# Altium PCB Aptomat_Radio.PcbDoc
Units mm, origin at the board's own origin, x right, y up, seen from the top; angles counter-clockwise.
Board outline 89.01 x 23.51 mm, 2 copper layers (Top Layer, Bottom Layer), stack 1.58 mm thick; 45 components, 56 nets, 163 pads, 280 vias.
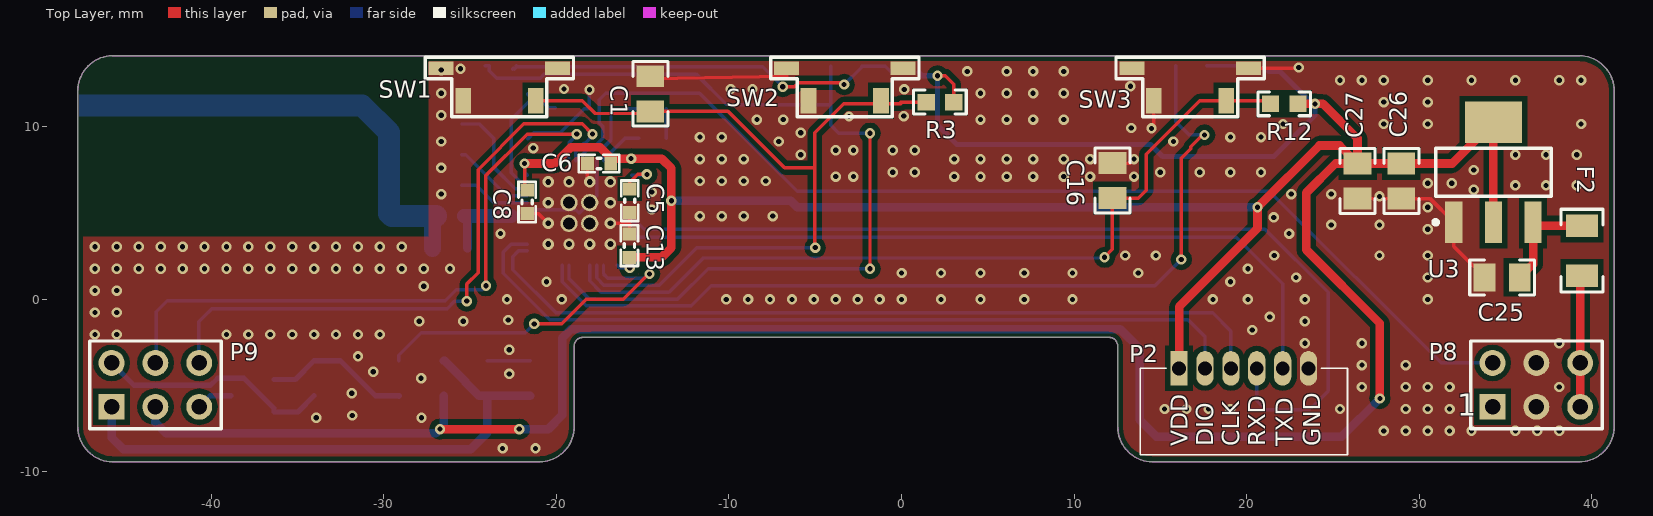
[diagram p0: Top Layer view]
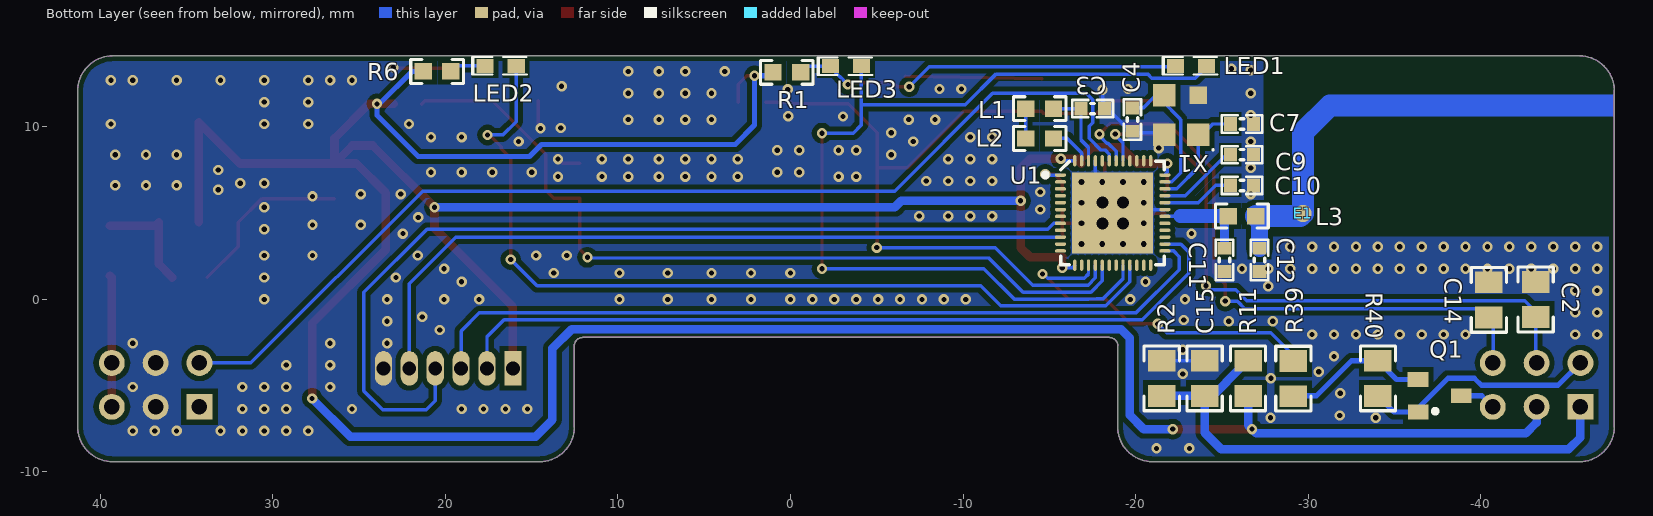
[diagram p1: Bottom Layer view, seen from below]

## Layer stack, top to bottom
Top Solder: solder mask 0.0102, Solder Resist, Dk 3.5
Top Layer: signal copper 0.0356
Dielectric 1: dielectric 1.5086, FR-4, Dk 4.8
Bottom Layer: signal copper 0.0356
Bottom Solder: solder mask 0.0102, Solder Resist, Dk 3.5

## Board outline
-45.72,-9.405 cw(c-45.72,-7.398) -47.727,-7.398 cw(c-45.72,-7.398) -47.727,-7.398 -47.727,12.102 cw(c-47.72,12.102) -47.727,12.102 ccw(c-45.72,12.102) -47.727,12.102 cw(c-45.72,12.102) -45.72,14.109 39.28,14.109 cw(c39.28,12.102) 41.287,12.102 41.287,-7.398 cw(c39.28,-7.398) 39.28,-9.405 cw(c39.28,-9.398) 39.28,-9.405 14.53,-9.405 ccw(c14.53,-9.398) 14.53,-9.405 cw(c14.53,-7.398) 12.523,-7.407 cw(c12.527,-7.401) 12.52,-7.401 12.52,-2.701 ccw(c12.027,-2.701) 12.027,-2.208 -18.473,-2.208 ccw(c-18.473,-2.701) -18.967,-2.701 -18.967,-3.192 cw(c-18.97,-3.198) -18.965,-3.193 cw(c-18.97,-3.198) -18.963,-3.198 -18.963,-7.398 ccw(c-18.97,-7.398) -18.963,-7.398 cw(c-20.97,-7.398) -20.97,-9.405 cw(c-20.97,-9.398) -20.97,-9.405

## Design rules (kind name [scope] priority, off if disabled: settings)
Clearance polygon [IsRegion] p1: gap=0.3
Clearance [All] p2: gap=0.2
MinimumSolderMaskSliver [All] p1: minsoldermaskwidth=0.1
PolygonConnect [All] p1: connectstyle=Direct reliefconductorwidth=0.254 reliefentries=4 polygonreliefangle="90 Angle" airgapwidth=0.254
RoutingVias [All] p1: holewidth=0.3 width=0.6 viastyle="Through Hole" minholewidth=0.3 minwidth=0.6 maxholewidth=5 maxwidth=5
SilkToSilkClearance [All] p1: silktosilkclearance=0.1
SilkToSolderMaskClearance [IsPad] p1: minsilkscreentomaskgap=0.01 clearancetoexposedcopper=TRUE
SolderMaskExpansion [All] p1: expansion=0.102
Width [All] p1: maxlimit=5 minlimit=0.127 preferedwidth=0.254
27 further rules are at their usual default settings.

## Components (designator, comment, footprint, x,y, rotation, side; value= is the part's Value field where it differs from the comment)
C1 "221" 0805_HV -14.554,11.913 r270 top
C2 "102" 0805_HV -43.18,0 r270 bottom
C3 "1.0µF" CAPC1608X06L -17.511,11.049 r0 bottom
C4 "12pF" CAPC1608X06L -19.812,10.414 r270 bottom
C5 "100nF" CAPC1608X06L -15.748,5.715 r270 top
C6 "4.7µF" CAPC1608X06L -17.526,7.874 r180 top
C7 "12pF" CAPC1608X06L -26.162,10.16 r180 bottom
C8 "100nF" CAPC1608X06L -21.692,5.65 r270 top
C9 "100pF" CAPC1608X06L -26.162,8.382 r180 bottom
C10 "N.C." CAPC1608X06L -26.162,6.604 r180 bottom
C11 "0.8pF" CAPC1608X06L -25.146,2.286 r90 bottom
C12 "1.2pF" CAPC1608X06L -27.178,2.286 r270 bottom
C13 "100nF" CAPC1608X06L -15.773,3.11 r90 top
C14 "102" 0805_HV -40.462,-0.025 r270 bottom
C15 "104" 0805_HV -24.003,-4.572 r270 bottom
C16 "221" 0805_HV 12.217,6.883 r270 top
C25 "105" 0805_HV 34.798,1.27 r0 top
C26 "105" 0805_HV 28.956,6.858 r90 top
C27 "105" 0805_HV 26.416,6.858 r90 top
E1 "Antenna" nrfant -29.693,4.978 r180 bottom
F2 "Res" 1206 39.421,2.822 r90 top
L1 "15nH" 0603 -14.44,11.049 r0 bottom
L2 "10µH" 0603 -14.44,9.322 r180 bottom
L3 "3.9nH" 0603 -26.162,4.826 r180 bottom
LED1 "L0603G" LED_0603N -23.213,13.528 r180 bottom
LED2 "L0603G" LED_0603N 16.792,13.528 r180 bottom
LED3 "L0603G" LED_0603N -3.216,13.514 r180 bottom
P2 "Header 6" CON6P-ZH1.5 16.08,-3.998 r0 top
P8 "Header 3X2" HDR2X3 34.239,-6.223 r0 top locked
P9 "Header 3X2" HDR2X3 -45.771,-6.223 r0 top
Q1 "C1815" SOT23B -37.612,-5.588 r90 bottom
R1 "220R" 0603 0.203,13.157 r0 bottom
R2 "2K" 0805_HV -21.514,-4.572 r90 bottom
R3 "100k" 0603 2.223,11.43 r0 top
R6 "220R" 0603 20.472,13.208 r0 bottom
R11 "2K" 0805_HV -26.518,-4.572 r90 bottom
R12 "100k" 0603 22.174,11.328 r0 top
R39 "1K" 0805_HV -29.134,-4.597 r90 bottom
R40 "10K" 0805_HV -34.036,-4.572 r270 bottom
SW1 "PB SW" TL3330AF260QG -23.241,12.37 r180 top locked
SW2 "PB SW" TL3330AF260QG -3.226,12.37 r180 top
SW3 "PB SW" TL3330AF260QG 16.789,12.37 r180 top locked
U1 "nRF52832-QFAA" QFN40P600X600X90-48N -18.669,5.004 r180 bottom locked
U3 "AMS1117-3.3V SOT223 _MH" SOT223 34.29,7.366 r0 top
X1 "CX3225SB32000D0FFFCC" SON230P260X60-4N -22.637,10.675 r0 bottom

## Footprints (in the part's own frame and the unit in brackets; to place one, negate y for a bottom-side part, rotate by r counter-clockwise, add the part's x,y. Pads: shape width x height; smd on the part's side, far side on the other; paste and mask are expansions set on the pad)
0603 [mm] "0603 from SM-752 data"
  rect 1x0.95 smd: 1(-0.8,0) 2(0.8,0)
  silkscreen extent -1.52,-0.69 1.52,0.69, body extent -0.87,-0.47 0.87,0.47, height 1
0805_HV [mil] "0805 with 30mil clearance between pads"
  rect 50x63 smd: 1(-40,0) 2(40,0)
  silkscreen extent -74,-40 74,40, body extent -43,-29 43,29, height 57
1206 [mm] "1206 from SM-752 data"
  rect 1.3x1.85 smd: 1(1.45,0) 2(-1.45,0)
  silkscreen extent -2.4,-1.21 2.4,1.21, body extent -1.7,-0.9 1.7,0.9, height 1.35
CAPC1608X06L [mm]
  rect 0.75x0.8 smd: 1(-0.675,0) 2(0.675,0)
  silkscreen extent -1.17,-0.5 1.17,0.5, body extent -0.8,-0.43 0.8,0.43, height 0.8
CON6P-ZH1.5 [mm] "CON6"
  rect 1x2 hole 0.8 paste+0: 1(0,0)
  oval 1x2 hole 0.8 paste+0: 2(1.5,0) 3(3,0) 4(4.5,0) 5(6,0) 6(7.5,0)
  silkscreen extent -2.25,-5 9.75,0
HDR2X3 [mm] "Connector; Header; 3x2 Position"
  rect 1.5x1.5 hole 0.9: 1(0,0)
  round 1.5 hole 0.9: 2(0,2.54) 3(2.54,0) 4(2.54,2.54) 5(5.08,0) 6(5.08,2.54)
  silkscreen extent -1.27,-1.27 6.35,3.81
LED_0603N [mm] "SMD Super Bright LED, GREEN"
  rect 1x0.813 smd: 1(0.9,0) 2(-0.9,0)
  silkscreen extent -1.65,-0.53 1.52,0.51, body extent -0.78,-0.31 0.82,0.89, height 0.3
nrfant [mm]
  round 1 smd: 1(0,0)
  Top Layer region: 17.286,5.617 17.286,6.887 18.048,6.887 18.048,5.617
  Top Layer lines w1.27: 17.401,6.248 1.559,6.248 ; 0,0 0,4.689 ; 1.559,6.248 1.559,6.248 ; 1.559,6.248 0,4.689 ; 0,4.689 0,4.689
QFN40P600X600X90-48N [mm]
  oval 0.65x0.2 smd: 1(-3.025,2.2) 2(-3.025,1.8) 3(-3.025,1.4) 4(-3.025,1) 5(-3.025,0.6) 6(-3.025,0.2) 7(-3.025,-0.2) 8(-3.025,-0.6) 9(-3.025,-1) 10(-3.025,-1.4) 11(-3.025,-1.8) 12(-3.025,-2.2) 25(3.025,-2.2) 26(3.025,-1.8) 27(3.025,-1.4) 28(3.025,-1) 29(3.025,-0.6) 30(3.025,-0.2) 31(3.025,0.2) 32(3.025,0.6) 33(3.025,1) 34(3.025,1.4) 35(3.025,1.8) 36(3.025,2.2)
  oval 0.2x0.65 smd: 13(-2.2,-3.025) 14(-1.8,-3.025) 15(-1.4,-3.025) 16(-1,-3.025) 17(-0.6,-3.025) 18(-0.2,-3.025) 19(0.2,-3.025) 20(0.6,-3.025) 21(1,-3.025) 22(1.4,-3.025) 23(1.8,-3.025) 24(2.2,-3.025) 37(2.2,3.025) 38(1.8,3.025) 39(1.4,3.025) 40(1,3.025) 41(0.6,3.025) 42(0.2,3.025) 43(-0.2,3.025) 44(-0.6,3.025) 45(-1,3.025) 46(-1.4,3.025) 47(-1.8,3.025) 48(-2.2,3.025)
  rect 4.7x4.7 smd: 49(0,0)
  silkscreen extent -4.03,-3 3,3, body extent -3.02,-3.02 3.02,3.02, height 0.86
SON230P260X60-4N [mm] "SON, 4-Leads, Body 3.25x2.55mm, Pitch 2.30mm, IPC Medium Density"
  rect 1.3x1.3 smd: 1(-0.985,1.15) 3(0.985,-1.15) 4(0.985,1.15)
  rect 1x1 smd: 2(-0.985,-1.15)
  silkscreen extent -1.9,1.96 -1.8,2.06, body extent -1.3,-1.65 1.3,1.65, height 0.6
SOT23B [mm] "SOT 23B"
  rect 0.85x1.2 smd: 1(0.95,1.25) 2(0,-1.25) 3(-0.94,1.245)
  silkscreen extent -1.02,0.13 -0.77,0.38, body extent -1.5,-1.2 1.5,1.3, height 1.06
SOT223 [mm]
  rect 1x2.4 smd: 1(-2.3,-2.9) 2(0,-2.9) 3(2.3,-2.9)
  rect 3.3x2.4 smd: 4(0,2.9)
  silkscreen extent -3.47,-3.02 3.35,1.4, body extent -3.25,-3.56 3.25,3.4, height 1.68
TL3330AF260QG [mm]
  rect 1.45x0.8 smd: 1(-3.302,-1.016) 1(3.444,-1.016)
  rect 0.9x1.5 smd: 1(2.167,0.864) 2(-2.035,0.864)
  silkscreen extent -4.23,-1.65 4.37,1.79, body extent -3.83,-2.18 3.97,1.33, height 3.41

## Part data
C1 C2 C14 C15 C16 C25 C26 C27: library part CM, "Cap SMD"
C3: library part C0603-1µ0, "Capacitor, X7R, ±10%"
C4 C7: library part C0402-12p, "Capacitor, NP0, ±2%"
C5 C8 C13: library part C0402-100n, "Capacitor, X7R, ±10%"
C6: library part C0603-4µ7, "Capacitor, X5R, ±10%"
C9: library part C0402-100p, "Capacitor, NP0, ±5%"
C10: library part C0402-N.C., "Not mounted"
C11: library part C0402-0.8p, "Capacitor, NP0, ±5%"
C12: library part C0402-1.2p, "Capacitor, NP0, ±0.1pF"
E1: "Generic Antenna"
F2: library part Res-SMD, "Resistor"
L1: library part L0402-15n, "Inductor, 320mA, ±5%"
L2: library part L0603-10µ, "Inductor, 80mA, ±10%"
L3: library part L0402-3n9, "Inductor, 170mA, ±0.1nH"
LED1 LED2 LED3: library part "LG L29K Smartled Green", "LED SMARTLED GREEN 570NM 0603"
P2: "Header, 6-Pin"
P8 P9: "Header, 3-Pin, Dual row"
Q1: "NPN 600mW, ECB"
R1 R6: library part R0402-220, "Resistor, ±1%, 0.063W"
R2 R11 R39 R40: library part R, "Resistor 1/4W"
R3 R12: library part R0402-100k, "Resistor, ±1%, 0.063W"
SW1 SW2 SW3: library part Switch-PB-6.2x6.3mm-SMD, "Tactile Switch, SPNO, SMD, 160gf, 6.2x6.3x2.5mm"
U1: "Multi-protocol Bluetooth Low Energy and 2.4GHz proprietary system-on-chip"
X1: library part XTAL_SMD2016_32MHz_8pF_Epson, "XTAL SMD 2016, 32MHz, Cl=8pF, Tol: ±10ppm, Stab: ±10ppm"

## Free pads (board coordinates)
  round 1 hole 0.7 paste+0: 0(-19.269,5.604) 1(-18.069,5.604) 2(-19.269,4.404) 3(-18.069,4.404)

## Via types
v1: diameter 0.6, hole 0.3, Top Layer to Bottom Layer, tented both sides, 264 vias
v2: diameter 0.66, hole 0.33, Top Layer to Bottom Layer, tented both sides, 16 vias

## Nets (pads, with @x,y where several pads share a name; then routed paths per layer and width w, separated by ;. In a path a pad name is that pad's centre, name@x,y a point inside that pad or via, vN(x,y) a via of type N, cw(c..) or ccw(c..) an arc to the next point about the centre after c; other vN are vias at no path point)
ANT: C12.1 E1.1 L3.2 | length 4.7
  Bottom Layer w1: C12.1 -27.178,4.61 L3.2
  Bottom Layer w1.27: E1.1 -29.54,4.826 L3.2
BUTTON1: C1.2 R3.1 SW1.2 SW2.2 U1.16 | length 46.3
  Top Layer w0.2: SW1.2 -18.491,11.506 -17.755,10.77 -14.681,10.77 C1.2 -10.058,10.897 -6.782,7.62 -5.022,7.62 ; v1(-5.004,2.997) -5.022,2.979 -5.022,7.62 ; -0.051,11.328 -3.353,11.328 -5.022,9.659 -5.022,7.62 ; -0.051,11.43 R3.1
  Bottom Layer w0.2: U1.16 -17.669,1.242 -17.248,0.821 -16.914,0.821 -16.912,0.819 -14.04,0.819 -11.862,2.997 v1(-5.004,2.997) ; v1@-5.105,2.946 v1@-5.08,2.921
BUTTON2: C16.2 R12.1 SW3.2 U1.17 | length 48.3
  Top Layer w0.2: v1(11.76,2.438) 12.217,2.896 C16.2 13.716,5.867 14.173,6.325 14.173,8.418 15.499,9.744 15.51,9.744 17.272,11.506 SW3.2 21.174,11.506 21.363,11.317 R12.1
  Bottom Layer w0.2: U1.17 -18.069,1.076 -17.414,0.421 -17.079,0.421 -17.078,0.419 -13.475,0.419 -11.497,2.397 11.719,2.397 v1(11.76,2.438)
CTS: 
CURRENT_SIGNAL1: C14.2 P9.6 U1.42 | length 36.3
  Top Layer w0.2: v1(-25.197,-0.102) -25.197,0.889 -24.536,1.549 -24.536,7.518 -21.879,10.176 -18.507,10.176 v1(-17.907,9.576)
  Bottom Layer w0.2: P9.6 -40.716,-3.658 -40.716,-1.295 C14.2 -39.954,-0.533 -26.333,-0.533 -25.901,-0.102 v1(-25.197,-0.102) ; U1.42 -18.869,8.585 -18.4,9.054 -18.327,9.054 -17.907,9.474 v1(-17.907,9.576)
CURRENT_SIGNAL2: C2.2 P9.4 U1.41 | length 37.1
  Top Layer w0.2: v1(-24.079,0.787) -24.079,7.188 -21.692,9.576 v1(-18.821,9.576)
  Bottom Layer w0.2: P9.4 -43.18,-3.632 C2.2 -43.18,-0.711 -42.545,-0.076 -26.441,-0.076 -25.806,0.559 -24.308,0.559 v1(-24.079,0.787) ; U1.41 -19.269,9.072 -18.821,9.52 v1(-18.821,9.576)
CURRENT_SIGNAL3: U1.40
DEC1: C5.1 U1.1 | length 2.6
  Top Layer w0.2: C5.1@-15.748,6.263 C5.1 -15.748,6.782 -15.291,7.239 v1(-14.757,7.239)
  Bottom Layer w0.2: U1.1 -14.793,7.204 v1(-14.757,7.239)
DEC2: C10.1 U1.32 | length 4.2
  Bottom Layer w0.2: C10.1 -24.638,6.604 -23.638,5.604 U1.32
DEC3: C9.1 U1.33 | length 4.8
  Bottom Layer w0.2: C9.1 -25.248,8.382 -22.869,6.004 U1.33
DEC4: C3.2 L1.1 U1.46 | length 4.8
  Bottom Layer w0.2: U1.46 -17.269,8.8 -16.836,9.232 C3.2 L1.1
GND: C1.1 C2.1 C3.1 C4.2 C5.2 C6.2 C7.2 C8.2 C9.2 C10.2 C11.1 C12.2 C13.2 C14.1 C15.1 C16.1 C25.1 C26.1 C27.1 P2.6 P8.3 P8.4 pad.0 pad.1 pad.2 pad.3 R2.2 SW1.1 SW2.1 SW3.1 U1.31 U1.45 U1.49 U3.1 X1.2 X1.4 | length 43.4
  Top Layer w0.2: C8.2 -21.04,4.975 v2(-20.469,4.404) ; C6.2 -18.201,6.936 v2(-18.069,6.804) ; v2(-16.869,4.404) -15.769,4.404 -15.748,4.425 ; C13.2 -15.748,3.81 -15.748,4.425 ; C5.2 -15.748,4.425 ; C1.1@-14.551,12.769 -6.661,12.936 -6.641,12.937 ; v1@0.051,12.243 0.127,12.167 v1(0.152,12.167) ; C16.1 13.233,7.899 v1(13.462,8.128) ; v1(14.478,9.906) 14.623,10.051 SW3.1@14.623,11.506 ; SW3.1@20.091,13.386 22.962,13.386 v1(23.012,13.437) ; C27.1 C26.1 30.614,5.842 U3.1 31.99,3.062 C25.1
  Bottom Layer w0.2: C15.1 R2.2 ; U1.31 -18.869,5.204 U1.49 v2(-18.069,5.604) -17.669,6.004 U1.45 ; X1.4@-21.646,9.315 -21.309,9.652 -19.787,9.652 -18.39,11.049 C3.1 -18.085,11.151 v1(-18.085,12.141)
  other v1: -23.114,-8.636 -21.209,-8.636 27.94,-7.62 29.21,-7.62 30.48,-7.62 31.75,-7.62 33.02,-7.62 35.56,-7.62 36.83,-7.62 38.1,-7.62 -33.909,-6.858 -27.813,-6.858 -31.826,-6.731 15.24,-6.35 16.51,-6.35 17.78,-6.35 19.05,-6.35 25.4,-6.35 29.21,-6.35 30.48,-6.35 31.75,-6.35 -31.852,-5.436 26.67,-5.08 29.21,-5.08 30.48,-5.08 31.75,-5.08 38.1,-5.08 -27.838,-4.572 -22.733,-4.318 -30.607,-4.191 26.67,-3.81 29.21,-3.81 -31.496,-3.302 -22.733,-2.921 23.368,-2.54 26.67,-2.54 38.1,-2.54 -46.736,-2.032 -45.466,-2.032 -39.116,-2.032 -37.846,-2.032 -36.576,-2.032 -35.306,-2.032 -34.036,-2.032 -32.766,-2.032 -31.496,-2.032 -30.226,-2.032 20.32,-1.778 -27.94,-1.27 -25.4,-1.27 23.368,-1.27 -22.784,-1.194 21.336,-1.016 -46.736,-0.762 -45.466,-0.762 -22.86,0 -19.685,0 -10.16,0 -8.89,0 -7.62,0 -6.35,0 -5.08,0 -3.81,0 -2.54,0 -1.27,0 0,0 2.286,0 4.572,0 7.112,0 9.906,0 18.034,0 20.066,0 23.368,0 30.48,0 -46.736,0.508 -45.466,0.508 -27.686,0.762 -20.574,1.016 19.05,1.016 22.86,1.27 30.48,1.27 0,1.524 2.286,1.524 4.572,1.524 7.112,1.524 9.906,1.524 13.716,1.524 -46.736,1.778 -45.466,1.778 -44.196,1.778 -42.926,1.778 -41.656,1.778 -40.386,1.778 -39.116,1.778 -37.846,1.778 -36.576,1.778 -35.306,1.778 -34.036,1.778 -32.766,1.778 -31.496,1.778 -30.226,1.778 -28.956,1.778 -27.686,1.778 -26.162,1.778 20.066,1.778 12.954,2.54 14.732,2.54 21.59,2.54 27.686,2.54 30.48,2.54 -46.736,3.048 -45.466,3.048 -44.196,3.048 -42.926,3.048 -41.656,3.048 -40.386,3.048 -39.116,3.048 -37.846,3.048 -36.576,3.048 -35.306,3.048 -34.036,3.048 -32.766,3.048 -31.496,3.048 -30.226,3.048 -28.956,3.048 -23.241,3.81 22.454,3.81 30.48,4.064 24.892,4.318 27.686,4.318 21.565,4.75 -11.684,4.826 -10.414,4.826 -9.144,4.826 -7.468,4.826 -14.478,5.207 30.48,5.334 27.686,5.969 -26.67,6.096 22.581,6.096 24.892,6.096 -14.478,6.223 33.147,6.35 35.56,6.604 37.338,6.604 39.116,6.604 30.48,6.731 31.877,6.731 -11.684,6.858 -10.414,6.858 -9.144,6.858 -7.874,6.858 -3.81,7.112 -2.794,7.112 3.048,7.112 4.572,7.112 6.096,7.112 7.62,7.112 9.398,7.112 10.922,7.112 13.462,7.112 -0.508,7.366 0.762,7.366 14.986,7.366 17.272,7.366 19.05,7.366 20.828,7.366 33.147,7.493 -26.67,7.62 -11.684,8.128 -10.414,8.128 -9.144,8.128 3.048,8.128 4.572,8.128 6.096,8.128 7.62,8.128 9.398,8.128 10.922,8.128 -5.842,8.382 35.56,8.382 37.338,8.382 39.116,8.382 -3.81,8.636 -2.794,8.636 -0.508,8.636 0.762,8.636 -21.336,8.763 -26.67,9.144 -7.112,9.144 15.748,9.144 -11.684,9.398 -10.414,9.398 19.05,9.398 20.828,9.398 -5.842,9.652 13.31,9.931 22.098,10.16 27.94,10.16 30.48,10.16 39.37,10.16 -8.382,10.414 -6.858,10.414 4.572,10.414 6.096,10.414 7.62,10.414 9.398,10.414 -3.048,10.592 0.127,10.617 -26.67,10.668 27.94,11.43 30.48,11.43 -26.67,11.938 4.572,11.938 6.096,11.938 7.62,11.938 9.398,11.938 -19.558,12.192 -9.906,12.192 -8.636,12.192 13.259,12.344 25.4,12.7 26.67,12.7 27.94,12.7 30.48,12.7 33.02,12.7 35.56,12.7 38.1,12.7 39.37,12.7 3.81,13.208 6.096,13.208 7.62,13.208 9.398,13.208 -26.67,13.284 -25.552,13.36
  other v2: -20.469,3.204 -19.269,3.204 -18.069,3.204 -16.869,3.204 -19.269,4.404 -18.069,4.404 -20.469,5.604 -19.269,5.604 -16.869,5.604 -20.469,6.804 -19.269,6.804 -16.869,6.804
GND_RL: P9.2 Q1.3 R40.2 | length 13.8
  Bottom Layer w0.3: P9.2 -44.475,-4.978 -40.03,-4.978 -39.624,-4.572 -38.1,-4.572 -36.367,-6.305 Q1.3 -34.976,-6.528 R40.2
LED1: LED1.1 LED3.1 U1.20 | length 54.5
  Top Layer w0.2: v1(-1.829,1.778) v1(-1.829,9.627)
  Bottom Layer w0.2: LED1.1 -23.888,13.528 -23.888,13.249 -23.461,12.822 -20.935,12.822 -20.701,13.056 -11.913,13.056 -10.135,11.278 -4.116,11.278 ; U1.20 -19.269,1.191 -18.102,0.024 -17.749,0.024 -17.746,0.021 -17.245,0.021 -17.243,0.019 -12.96,0.019 -11.201,1.778 v1(-1.829,1.778) ; LED3.1 -4.116,11.278 ; v1(-1.829,9.627) -3.632,9.627 -4.116,10.111 -4.116,11.278
LED2: LED2.1 U1.21 | length 51.7
  Top Layer w0.2: v1(16.205,2.311) 16.205,8.187 16.748,8.73 16.748,8.849 17.475,9.576 17.526,9.525 v1(17.551,9.525)
  Bottom Layer w0.2: U1.21 -19.669,1.025 -18.267,-0.376 -17.914,-0.376 -17.911,-0.379 -17.411,-0.379 -17.409,-0.381 -12.192,-0.381 -11.024,0.787 14.681,0.787 v1(16.205,2.311) ; LED2.1 15.892,10.295 16.662,9.525 v1(17.551,9.525) 17.551,9.55 v1@17.501,9.601
NetC11_2: C11.2 L3.1 U1.30 | length 5.9
  Bottom Layer w0.2: L3.1 L3.1@-25.34,4.804 ; -23.114,4.804 U1.30
  Bottom Layer w0.5: C11.2 L3.1@-25.146,4.61
  Bottom Layer w0.8: L3.1 -22.606,4.826
NetC25_2: C25.2 F2.1 U3.3 | length 6.4
  Top Layer w0.5: C25.2 36.59,2.046 U3.3 36.784,4.272 F2.1
NetL1_2: L1.2 L2.1 | length 1.7
  Bottom Layer w0.2: L2.1 L1.2
NetL2_2: L2.2 U1.47 | length 2.4
  Bottom Layer w0.2: U1.47 -16.869,8.48 -16.027,9.322 L2.2
NetLED1_2: LED1.2 LED3.2 R1.1 | length 23.1
  Top Layer w0.2: v1(-6.883,12.319) -6.204,12.319 -5.967,12.556 -3.438,12.556 v1(-3.327,12.446)
  Bottom Layer w0.2: LED1.2@-22.543,13.335 LED1.2@-22.497,13.381 ; LED1.2@-22.441,13.335 LED1.2@-22.395,13.381 ; LED1.2 -22.272,13.487 -8.052,13.487 v1(-6.883,12.319) ; v1(-3.327,12.446) -3.327,12.448 -2.316,13.459 LED3.2 -0.954,13.514 R1.1
NetLED2_2: LED2.2 R6.1 | length 2.1
  Bottom Layer w0.2: LED2.2 19.352,13.528 R6.1
NetQ1_1: Q1.1 R39.1 R40.1 | length 8.6
  Bottom Layer w0.3: Q1.1@-36.342,-4.638 -35.118,-4.638 R40.1 -32.512,-3.556 -30.48,-5.588 -29.108,-5.588 R39.1
P0.00: U1.2
P0.01: U1.3
P0.02: U1.4
P0.03: U1.5
P0.04: U1.6
P0.05: U1.7
P0.06: P2.4 U1.8 | length 54.4
  Bottom Layer w0.2: U1.8 -15.253,4.404 -14.914,4.064 21.057,4.064 24.714,0.406 24.714,-5.309 23.622,-6.401 21.107,-6.401 20.58,-5.873 P2.4
P0.07: U1.9
P0.08: P2.5 U1.10 | length 43.7
  Bottom Layer w0.2: U1.10 19.383,3.604 22.08,0.907 P2.5
P0.09/NFC1: U1.11
P0.10/NFC2: U1.12
P0.11: U1.14
P0.12: R39.2 U1.15 | length 20.2
  Top Layer w0.2: v1(-21.285,-1.422) -19.685,-1.422 -18.263,0 -16.129,0 -14.656,1.473 v1(-14.605,1.473)
  Bottom Layer w0.2: R39.2@-29.134,-3.556 -29.134,-3.226 -27.838,-1.93 -21.793,-1.93 v1(-21.285,-1.422) ; U1.15 -17.269,1.47 -17.02,1.221 -16.748,1.221 -16.746,1.219 -14.91,1.219 v1@-14.618,1.511
P0.15: U1.18
P0.16: U1.19
P0.19: U1.22
P0.20: U1.23
P0.21: U1.24
P0.22: U1.27
P0.23: U1.28
P0.24: U1.29
P0.25: U1.37
P0.26: U1.38
P0.27: U1.39
P0.31: P8.2 U1.43 | length 62.6
  Bottom Layer w0.2: U1.43 -18.469,8.419 -18.235,8.654 -17.98,8.654 -17.307,9.327 -17.307,10.026 -17.511,10.231 -17.511,11.573 -17.147,11.938 -11.709,11.938 -6.045,6.274 21.311,6.274 31.267,-3.683 P8.2
RL1: P9.5 Q1.2 | length 2.1
  Bottom Layer w0.3: P9.5 -40.056,-5.588 Q1.2
RTS: 
SWDCLK: P2.3 U1.25 | length 47
  Bottom Layer w0.2: U1.25 -22.202,2.804 -22.53,2.476 -22.53,1.727 -20.024,-0.779 -19.184,-0.779 -19.181,-0.776 -18.08,-0.776 -18.075,-0.781 11.48,-0.781 11.485,-0.776 18.023,-0.776 19.08,-1.833 P2.3
SWDIO: P2.2 U1.26 | length 46.8
  Bottom Layer w0.2: U1.26 -22.628,3.204 -23.089,2.743 -23.089,1.524 -20.384,-1.181 -19.005,-1.181 -19,-1.176 -18.246,-1.176 -18.241,-1.181 11.646,-1.181 11.651,-1.176 16.594,-1.176 17.58,-2.162 P2.2
VCC_RELAY: F2.2 P8.5 P8.6 | length 7.6
  Top Layer w0.5: P8.5 P8.6 39.319,1.27 F2.2
VDD_NRF: C6.1 C8.1 C13.1 C26.2 C27.2 P2.1 P9.3 R1.2 R3.2 R6.2 R11.1 R12.2 U1.13 U1.36 U1.48 U3.2 U3.4 | length 231.3
  Top Layer w0.2: v1(-21.844,7.874) -21.844,6.429 C8.1@-21.694,6.279 ; C6.1 C6.1@-16.851,8.19 ; v1@2.045,12.916 v1(2.083,12.954) 2.54,12.954 3.023,12.471 R3.2
  Top Layer w0.5: v1(-26.746,-7.518) v1(-22.149,-7.518) ; v1(-21.844,7.874) -20.091,7.874 -19.152,8.814 -17.475,8.814 C6.1@-16.851,8.19 ; C6.1 -16.572,8.153 v1(-15.672,8.153) -13.894,8.153 -13.335,7.595 v1(-13.335,5.715) -13.335,2.997 -13.898,2.435 C13.1 ; v1(-15.748,1.829) C13.1@-15.748,2.083 ; P2.1 16.08,-0.43 20.625,4.115 v1(20.625,5.334) 24.206,8.915 25.375,8.915 C27.2 ; R12.2 v1(23.952,11.328) 24.409,11.328 26.416,9.322 C27.2 ; v1(27.711,-5.74) 27.711,-1.397 23.444,2.87 23.444,6.172 25.146,7.874 C27.2 ; U3.2 U3.4 31.898,7.874 C26.2 C27.2
  Bottom Layer w0.2: v1(-21.844,7.874) -21.844,7.354 U1.36 ; U1.13 -16.319,1.829 v1(-15.748,1.829) ; U1.48@-16.459,8.039 U1.48 -15.796,8.029 v1(-15.672,8.153)
  Bottom Layer w0.3: R1.2 1.206,12.954 v1(2.083,12.954) 2.083,10.094 3.2,8.977 14.417,8.977 15.113,8.28 21.565,8.28 23.952,10.668 v1(23.952,11.328) 23.8,11.328 21.92,13.208 R6.2
  Bottom Layer w0.5: P9.3 -43.231,-7.137 -42.603,-7.765 -26.993,-7.765 v1(-26.746,-7.518) -26.518,-7.29 R11.1 ; v1(-22.149,-7.518) -20.472,-7.518 -19.66,-6.706 -19.66,-2.235 -19.155,-1.731 -18.777,-1.731 -18.772,-1.726 -18.473,-1.726 -18.469,-1.731 11.889,-1.731 11.894,-1.726 12.674,-1.726 13.792,-2.845 13.792,-6.985 14.757,-7.95 25.502,-7.95 v1(27.711,-5.74) ; v1(-13.335,5.715) -6.426,5.715 -6.045,5.334 v1(20.625,5.334)
VREF: C15.2 P9.1 R2.1 R11.2 | length 32.2
  Bottom Layer w0.5: P9.1 -45.771,-8.001 -45.085,-8.687 -24.968,-8.687 -24.003,-7.722 C15.2 ; R11.2 -26.478,-3.556 -25.268,-4.767 -25.268,-4.806 -24.486,-5.588 C15.2 ; R2.1 C15.2
XC1: C7.1 U1.34 X1.1 | length 6.3
  Bottom Layer w0.2: C7.1 -24.462,10.16 -23.616,9.315 -23.616,7.64 -22.38,6.404 U1.34
XC2: C4.1 U1.35 X1.3 | length 7.7
  Bottom Layer w0.2: U1.35 -22.085,6.804 -22.606,7.325 -22.606,10.402 -22.571,10.438 -22.571,10.475 X1.3@-21.538,11.507 ; X1.3@-21.652,11.901 X1.3@-21.633,11.882 ; X1.3@-21.646,11.869 -21.538,11.761 -21.108,11.761 -20.436,11.089 C4.1@-20.066,11.089
pads on no net: P8.1 U1.44

## Polygon pours and split planes (outlines as drawn)
GND on Bottom Layer "Bottom Layer-No Net" (solid, remove dead copper, pour order 4): -27.411,3.621 -47.699,3.621 -47.699,-7.384 -47.12,-8.8 -45.699,-9.384 -20.763,-9.384 -19.528,-8.8 -18.959,-7.58 -18.959,-2.792 -18.558,-2.391 -18.338,-2.171 -17.302,-2.171 11.939,-2.171 12.344,-2.576 12.569,-2.8 12.569,-3.669 12.569,-7.708 13.13,-8.8 14.245,-9.384 15.413,-9.384 39.487,-9.384 40.661,-8.8 41.291,-7.58 41.291,12.312 40.661,13.527 39.497,14.106 -27.406,14.106
GND on Top Layer "Bottom Layer-No Net" (solid, remove dead copper, pour order 3): -27.395,3.624 -47.683,3.624 -47.683,-7.38 -47.104,-8.796 -45.683,-9.38 -20.746,-9.38 -19.512,-8.796 -18.942,-7.576 -18.942,-2.788 -18.541,-2.387 -18.321,-2.167 -17.285,-2.167 11.956,-2.167 12.361,-2.572 12.585,-2.796 12.585,-3.665 12.585,-7.704 13.146,-8.796 14.261,-9.38 15.43,-9.38 39.504,-9.38 40.677,-8.796 41.308,-7.576 41.308,12.316 40.677,13.53 39.514,14.11 -27.39,14.11

## Keep-outs
Keep-Out Layer:
  lines w0.013: -18.973,-7.401 -18.973,-2.701 cw(c-18.473,-2.701) -18.473,-2.201 12.027,-2.201 cw(c12.027,-2.701) 12.527,-2.701 12.527,-7.401 ; 11.53,-2.198 -17.97,-2.198 11.53,-2.198 ; -18.97,-7.398 cw(c-20.97,-7.398) -20.97,-9.398 -45.72,-9.398 cw(c-45.72,-7.398) -47.72,-7.398 -47.72,12.102 cw(c-45.72,12.102) -45.72,14.102 39.28,14.102 cw(c39.28,12.102) 41.28,12.102 41.28,-7.398 cw(c39.28,-7.398) 39.28,-9.398 14.53,-9.398 cw(c14.53,-7.398) 12.53,-7.398 ; -18.97,-7.398 -18.97,-3.198 -18.97,-7.398 ; 12.53,-7.398 12.53,-3.198 12.53,-7.398

## Silkscreen, mask and mechanical layers (free items; w line width, h text height)
Top Overlay:
  text "VDD" at 16.57,-8.508 h1 r90
  text "DIO" at 18.07,-8.508 h1 r90
  text "CLK" at 19.57,-8.508 h1 r90
  text "RXD" at 21.07,-8.508 h1 r90
  text "TXD" at 22.67,-8.508 h1 r90
  text "GND" at 24.27,-8.508 h1 r90
Mechanical 1:
  circle w0.013: c16.78,13.527 r0.375
  circle w0.013: c-3.22,13.527 r0.375
  circle w0.013: c-23.22,13.527 r0.375
  circle w0.013: c16.78,10.777 r0.375
  circle w0.013: c-3.22,10.777 r0.375
  circle w0.013: c-23.22,10.777 r0.375
  circle w0.013: c39.32,-3.668 r0.45
  circle w0.013: c-45.76,-3.668 r0.45
  circle w0.013: c-40.68,-3.668 r0.45
  circle w0.013: c-43.22,-3.668 r0.45
  circle w0.013: c34.24,-3.668 r0.45
  circle w0.013: c36.78,-3.668 r0.45
  circle w0.013: c34.24,-6.208 r0.45
  circle w0.013: c36.78,-6.208 r0.45
  circle w0.013: c-40.68,-6.208 r0.45
  circle w0.013: c-43.22,-6.208 r0.45
  circle w0.013: c-45.76,-6.208 r0.45
  circle w0.013: c39.32,-6.208 r0.45
  lines w0.013: -47.72,-2.398 41.28,-2.398 ; -47.72,-0.748 41.28,-0.748 ; -39.221,-9.307 -39.221,-6.11 ; -25.49,11.002 -25.843,11.002 ; -25.49,11.602 -25.843,11.602 ; -25.49,12.702 -25.843,12.702 ; -25.49,13.302 -25.843,13.302 ; -20.95,11.002 -20.597,11.002 ; -20.95,11.602 -20.597,11.602 ; -20.95,12.702 -20.597,12.702 ; -20.95,13.302 -20.597,13.302 ; -5.49,11.002 -5.843,11.002 ; -5.49,11.602 -5.843,11.602 ; -5.49,12.702 -5.843,12.702 ; -5.49,13.302 -5.843,13.302 ; -0.95,11.002 -0.597,11.002 ; -0.95,11.602 -0.597,11.602 ; -0.95,12.702 -0.597,12.702 ; -0.95,13.302 -0.597,13.302 ; 14.51,11.002 14.157,11.002 ; 14.51,11.602 14.157,11.602 ; 14.51,12.702 14.157,12.702 ; 14.51,13.302 14.157,13.302 ; 19.05,11.002 19.403,11.002 ; 19.05,11.602 19.403,11.602 ; 19.05,12.702 19.403,12.702 ; 19.05,13.302 19.403,13.302 ; -25.843,11.002 -25.973,11.002 -25.973,11.602 -25.843,11.602 ; -25.843,11.002 -25.843,11.602 ; -25.843,12.702 -25.973,12.702 -25.973,13.302 -25.843,13.302 ; -25.843,12.702 -25.843,13.302 ; -20.597,11.002 -20.467,11.002 -20.467,11.602 -20.597,11.602 ; -20.597,11.002 -20.597,11.602 ; -20.597,12.702 -20.467,12.702 -20.467,13.302 -20.597,13.302 ; -20.597,12.702 -20.597,13.302 ; -5.843,11.002 -5.973,11.002 -5.973,11.602 -5.843,11.602 ; -5.843,11.002 -5.843,11.602 ; -5.843,12.702 -5.973,12.702 -5.973,13.302 -5.843,13.302 ; -5.843,12.702 -5.843,13.302 ; -0.597,11.002 -0.467,11.002 -0.467,11.602 -0.597,11.602 ; -0.597,11.002 -0.597,11.602 ; -0.597,12.702 -0.597,13.302 ; -0.597,12.702 -0.467,12.702 -0.467,13.302 -0.597,13.302 ; 14.157,11.002 14.027,11.002 14.027,11.602 14.157,11.602 ; 14.157,11.002 14.157,11.602 ; 14.157,12.702 14.027,12.702 14.027,13.302 14.157,13.302 ; 14.157,12.702 14.157,13.302 ; 19.403,11.002 19.533,11.002 19.533,11.602 19.403,11.602 ; 19.403,11.002 19.403,11.602 ; 19.403,12.702 19.403,13.302 ; 19.403,12.702 19.533,12.702 19.533,13.302 19.403,13.302 ; -47.72,-7.398 ccw(c-45.72,-7.398) -45.72,-9.398 -20.97,-9.398 ccw(c-20.97,-7.398) -18.97,-7.398 -18.97,-3.198 cw(c-17.97,-3.198) -17.97,-2.198 11.53,-2.198 cw(c11.53,-3.198) 12.53,-3.198 12.53,-7.398 ccw(c14.53,-7.398) 14.53,-9.398 39.28,-9.398 ccw(c39.28,-7.398) 41.28,-7.398 41.28,12.102 ccw(c39.28,12.102) 39.28,14.102 -45.72,14.102 ccw(c-45.72,12.102) -47.72,12.102 -47.72,-7.398
Mechanical 13:
  drawing of 401 lines, arcs and shapes, not listed

## Text inside footprints (layer, text, board x,y; h text height)
P8: Top Overlay "1" at 32.207,-6.731 h1.27